# EAGLE board d11_usb_mini (EAGLE 7.3.0)
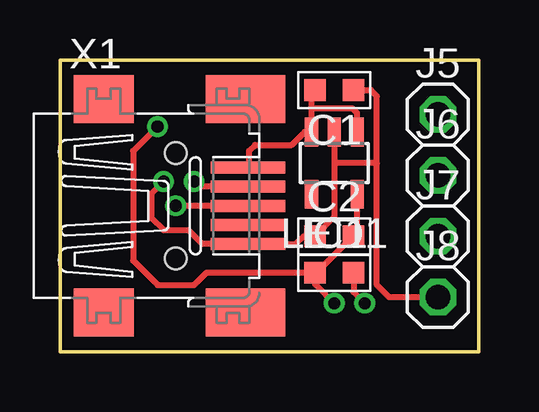
[diagram p0: board, top side]
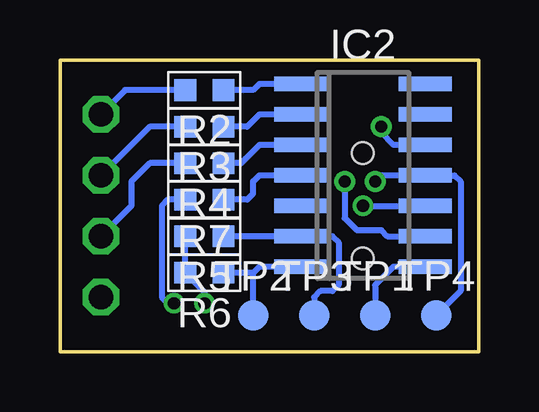
[diagram p1: board, bottom side, seen from below]

Size 17.45 x 12.18 mm. Coordinates in mm from the lower left corner, seen from the top.
Outline: 0,0 17.45,0 17.45,12.18 0,12.18 0,0
Copper layers (1*16): Top 0.0356mm / dielectric 1.5011mm / Bottom 0.0356mm
Design rules "OSHPark": minimum track width 6mil, minimum drill 13mil, track to track 6mil, track to pad 6mil, pad to pad 6mil, via to via 6mil, smd to smd 6mil, copper to edge 15mil, drill to drill 6mil, minimum pad ring 7mil, minimum via ring 7mil, stop-mask expansion 3mil, vias tented up to drill 0mil, thermal gap 10mil

## Footprints (pad centres in the part's own frame; a part is rotated, then mirrored left to right if it is on the bottom)
SMD0603 = smd 0.9 x 0.9: 1 -0.8,0; 2 0.8,0
SOT23-5 = smd 0.55 x 1.2: 1 -0.95,-1.3; 2 0,-1.3; 3 0.95,-1.3; 4 0.95,1.3; 5 -0.95,1.3
SO-14 = smd 0.6 x 2.2: 1 -3.81,-2.6; 2 -2.54,-2.6; 3 -1.27,-2.6; 4 0,-2.6; 5 1.27,-2.6; 6 2.54,-2.6; 7 3.81,-2.6; 8 3.81,2.6; 9 2.54,2.6; 10 1.27,2.6; 11 0,2.6; 12 -1.27,2.6; 13 -2.54,2.6; 14 -3.81,2.6
PIN-TH = drill 1.016 octagon: 1 0,0
TP-1.27MM = smd 1.27 x 1.27: 1 0,0
32005-201 = smd 3.1 x 0.5: 1 3,1.6; 2 3,0.8; 3 3,0; 4 3,-0.8; 5 3,-1.6 | smd 2.5 x 2: M1 -3,-4.45; M2 -3,4.45 | smd 3.3 x 2: M3 2.9,4.45; M4 2.9,-4.45 | hole 0.9: 0,2.2; 0,-2.2

## Placement (x,y rotation side)
C1  1uF  [SMD0603]  11.43,10.92 180 top
C2  1uF  [SMD0603]  11.43,4.83 0 top
IC1  MIC5504-3.3  [SOT23-5]  11.43,7.87 180 top
IC2  ATSAMD11C  [SO-14]  4.83,7.37 270 bottom
J5  SIO  [PIN-TH]  15.75,9.91 0 top
J6  SCK  [PIN-TH]  15.75,7.37 0 top
J7  RST  [PIN-TH]  15.75,4.83 0 top
J8  GND  [PIN-TH]  15.75,2.29 0 top
LED1  [SMD0603]  11.43,3.3 0 top
R2  330  [SMD0603]  11.43,10.92 180 bottom
R3  330  [SMD0603]  11.43,9.4 180 bottom
R4  330  [SMD0603]  11.43,7.87 180 bottom
R5  100K  [SMD0603]  11.43,4.83 180 bottom
R6  100K  [SMD0603]  11.43,3.3 180 bottom
R7  330  [SMD0603]  11.43,6.35 180 bottom
TP1  SIO  [TP-1.27MM]  4.32,1.52 0 bottom
TP2  [TP-1.27MM]  9.4,1.52 0 bottom
TP3  [TP-1.27MM]  6.86,1.52 0 bottom
TP4  [TP-1.27MM]  1.78,1.52 0 bottom
X1  MINI-USB-32005-201  [32005-201]  4.83,6.1 0 top

## Library data of the parts
C1 C2 R2-R7 = ataradov_rlc
IC1 = ataradov_vreg
IC2 = ataradov_mcu
J5-J8 = ataradov_conn
LED1 = ataradov_led
TP1-TP4 = ataradov_misc
X1 = con-cypressindustries; OC_FARNELL: unknown; OC_NEWARK: unknown

## Nets
+3V3: C2.2 IC1.5 IC2.12 LED1.1 R5.2 R6.2
GND: C1.1 C2.1 IC1.2 IC2.11 J8.1 TP4.1 X1.5
N$1: IC2.9 X1.2
N$2: IC2.10 X1.3
N$3: J5.1 R2.2
N$4: J6.1 R3.2
N$5: J7.1 R4.2
N$6: LED1.2 R7.2
PA02: IC2.13
PA04: IC2.14
PA05: IC2.1 R2.1
PA08: IC2.2 R3.1
PA09: IC2.3 R4.1
PA14: IC2.4 R7.1
PA15: IC2.5
RESET: IC2.6 R5.1 TP3.1
SWCLK: IC2.7 R6.1 TP2.1
SWDIO: IC2.8 TP1.1
V_USB: C1.2 IC1.1 IC1.3 X1.1

## Tracks (layer width: path | path; a pad name or v marks a point on that pad's centre or on a via)
+3V3  (via drill 0.51 pad 0.86)
  Top 0.254: v4.06,9.4 3.05,8.38 3.05,3.81 4.06,2.79 5.59,2.79 6.1,3.3 LED1.1 10.63,2.83 10.67,2.79 | IC1.5 12.38,4.98 R5.2 12.19,4.83 10.67,3.3 10.67,2.79 | 10.67,2.79 v11.43,2.03
  Bottom 0.254: IC2.12 3.56,8.64 4.06,9.14 v4.06,9.4 | R5.2 R6.2 11.43,2.5 v11.43,2.03
GND  (via drill 0.51 pad 0.86)
  Top 0.254: v4.32,7.11 3.81,6.6 3.81,5.59 4.32,5.08 5.33,5.08 5.92,4.5 X1.5 9.83,4.5 10.16,4.83 C2.1 11.43,5.63 11.43,7.87 | IC1.2 11.43,7.87 | C1.1 12.95,10.92 13.21,10.67 13.21,7.87 | 13.21,7.87 11.43,7.87 | J8.1 13.72,2.29 13.21,2.79 13.21,7.87
  Bottom 0.254: v4.32,7.11 4.06,7.37 IC2.11 1.02,7.37 0.76,7.11 0.76,2.54 TP4.1
N$1  (via drill 0.51 pad 0.86)
  Top 0.254: X1.2 5.88,6.9 v5.59,7.11
  Bottom 0.254: v5.59,7.11 5.59,5.59 5.08,5.08 4.06,5.08 3.81,4.83 IC2.9
N$2  (via drill 0.51 pad 0.86)
  Top 0.254: X1.3 v4.83,6.1
  Bottom 0.254: v4.83,6.1 IC2.10
N$3
  Bottom 0.254: R2.2 14.73,10.92 J5.1
N$4
  Bottom 0.254: R3.2 13.72,9.4 J6.1
N$5
  Bottom 0.254: R4.2 13.72,7.87 14.48,7.11 14.48,6.1 J7.1
N$6  (via drill 0.51 pad 0.86)
  Top 0.254: LED1.2 12.23,2.5 v12.7,2.03
  Bottom 0.254: R7.2 12.95,6.35 13.21,6.1 13.21,2.29 12.95,2.03 v12.7,2.03
PA05
  Bottom 0.254: IC2.1 9.14,11.18 9.4,10.92 R2.1
PA08
  Bottom 0.254: IC2.2 9.14,9.91 9.65,9.4 R3.1
PA09
  Bottom 0.254: IC2.3 9.14,8.64 9.91,7.87 R4.1
PA14
  Bottom 0.254: IC2.4 9.14,7.37 9.4,7.11 9.4,6.6 9.65,6.35 R7.1
RESET
  Bottom 0.254: TP3.1 6.86,2.29 6.6,2.54 6.1,2.54 5.84,2.79 5.84,4.57 6.1,4.83 IC2.6 R5.1
SWCLK
  Bottom 0.254: 7.37,3.5 IC2.7 9.14,3.56 9.4,3.3 | 9.4,3.3 R6.1 | TP2.1 9.4,3.3
SWDIO
  Bottom 0.254: IC2.8 3.56,3.56 4.32,2.79 TP1.1
V_USB
  Top 0.254: 10.48,10.16 IC1.3 10.19,9.17 9.65,8.64 8.13,8.64 7.87,8.38 7.87,7.74 X1.1 | 10.48,10.16 10.48,10.77 C1.2 | IC1.1 12.38,9.97 12.19,10.16 10.48,10.16

## Text on the board
bValues: AT | 1/26/17